# EAGLE board PandaSat_Payload (EAGLE 9.2.2)
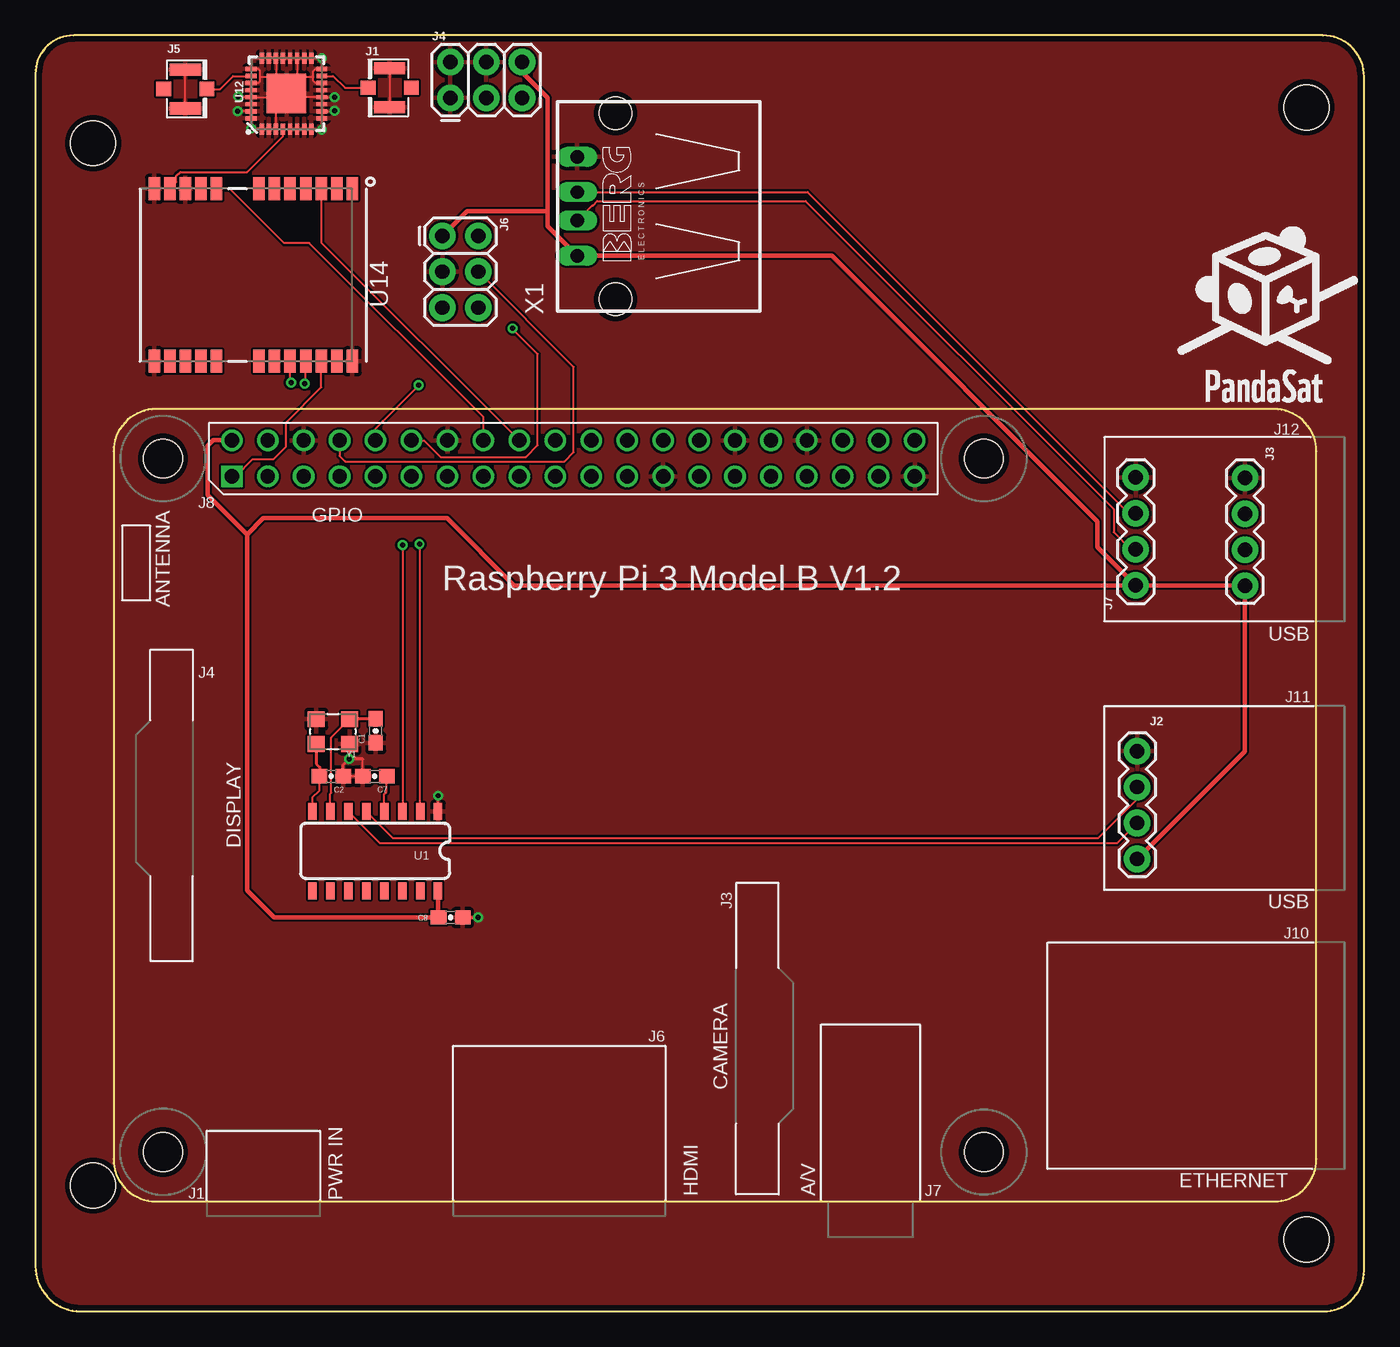
[diagram p0: board, top side]
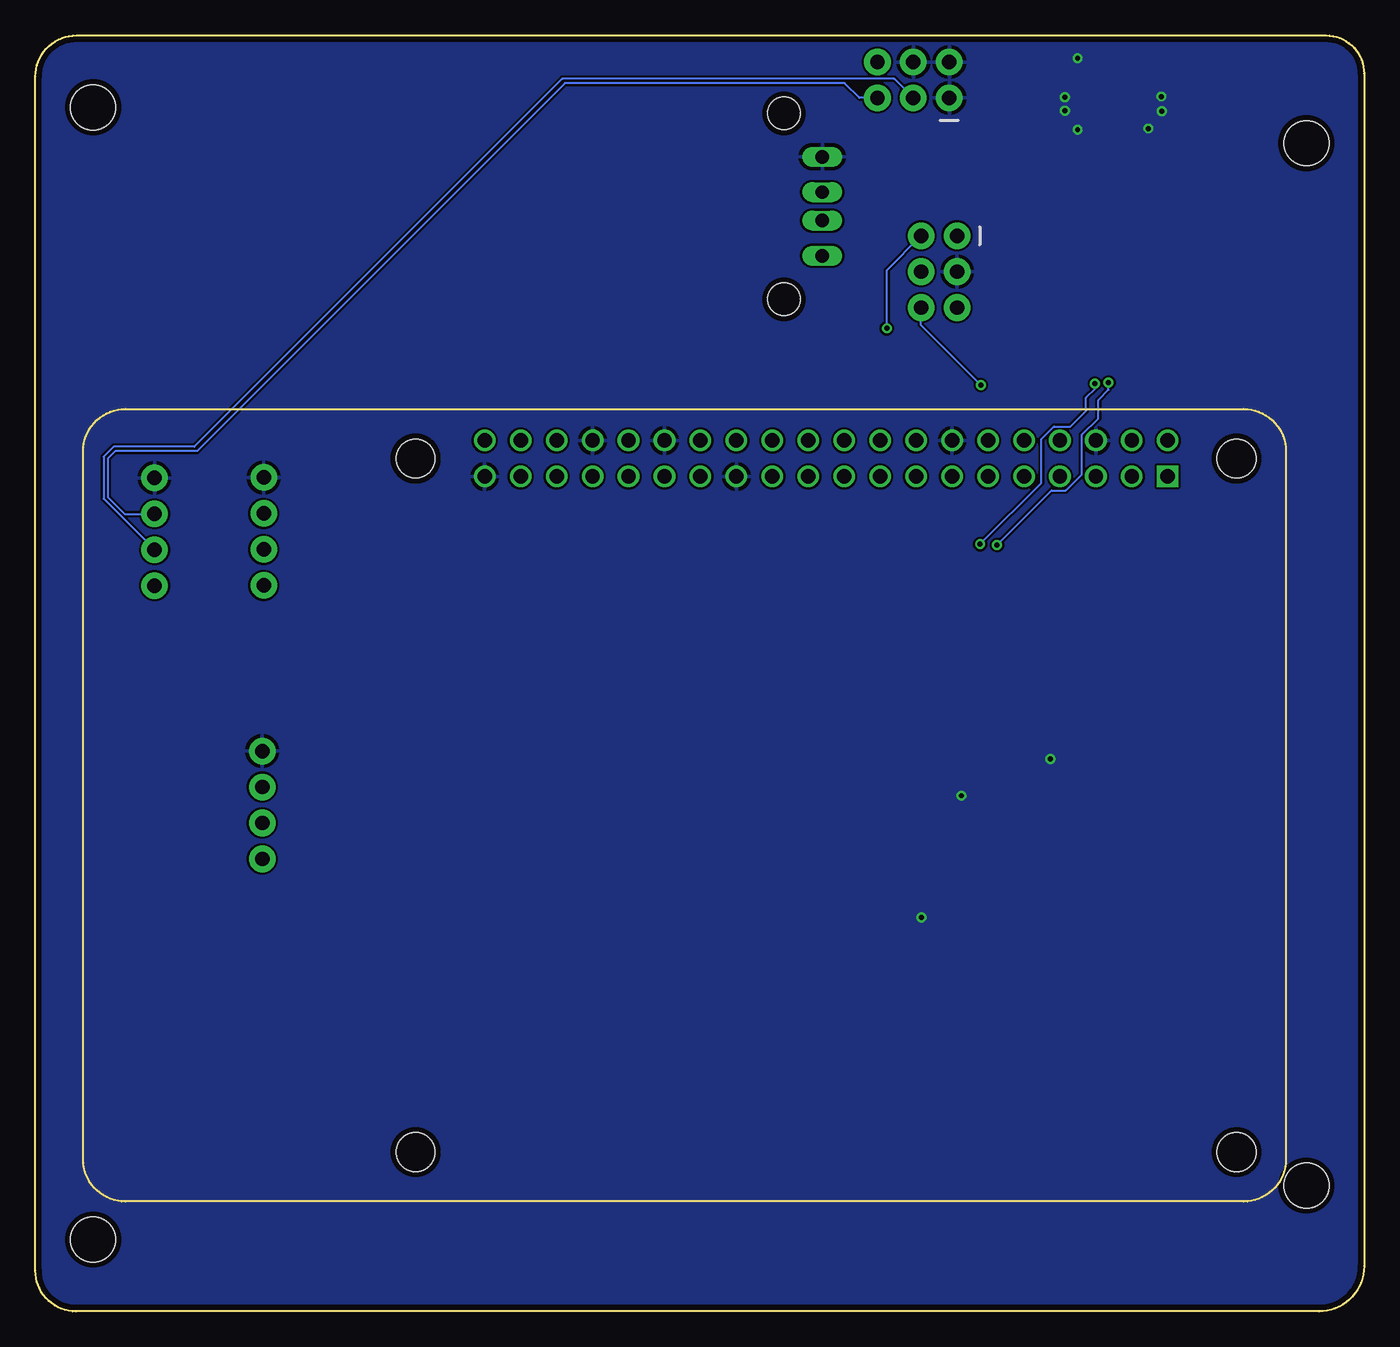
[diagram p1: board, bottom side, seen from below]

Size 93.89 x 90.17 mm. Coordinates in mm from the lower left corner, seen from the top.
Outline: 0,87.48 0,3.19 arc90 3.19,0 91.01,0 arc90 93.89,2.88 93.89,87.25 arc90 90.97,90.17 2.69,90.17 arc90 0,87.48
Copper layers (1*16): Top 0.035559375mm / dielectric 1.6mm / Bottom 0.035559375mm
Design rules "oshpark-2layer": minimum track width 6mil, minimum drill 10mil, track to track 6mil, track to pad 6mil, pad to pad 6mil, via to via 6mil, smd to smd 6mil, copper to edge 15mil, drill to drill 6mil, minimum pad ring 5mil, minimum via ring 5mil, stop-mask expansion 2.5mil, vias tented up to drill 0mil, thermal gap 10mil
Net classes: 1 power: width 0.178 mm
Holes 3.18 mm at 4.08,8.89 89.81,5.08 89.81,85.09 4.08,82.55

## Footprints (pad centres in the part's own frame; a part is rotated, then mirrored left to right if it is on the bottom)
0603-CAP = smd 1.1 x 1: 1 -0.85,0; 2 0.85,0
U.FL = smd 2.2 x 0.85: 1 0,1.375; 2 0,-1.375 | smd 1.05 x 1: FEED 1.525,0; NC -1.525,0
1X04 = drill 1.016 pad 1.88: 1 0,0; 2 2.54,0; 3 5.08,0; 4 7.62,0
2X3 = drill 1.016 pad 1.88: 1 0,0; 2 0,2.54; 3 2.54,0; 4 2.54,2.54; 5 5.08,0; 6 5.08,2.54
RPI3 = drill 1.016 square: P$1 8.37,51.23 | drill 1.016: P$2 8.357,53.772; P$3 10.897,51.232; P$4 10.897,53.772; P$5 13.437,51.232; P$6 13.437,53.772; P$7 15.977,51.232; P$8 15.977,53.772; P$9 18.517,51.232; P$10 18.517,53.772; P$11 21.057,51.232; P$12 21.057,53.772; P$13 23.597,51.232; P$14 23.597,53.772; P$15 26.137,51.232; P$16 26.137,53.772; P$17 28.677,51.232; P$18 28.677,53.772; P$19 31.217,51.232; P$20 31.217,53.772; P$21 33.757,51.232; P$22 33.757,53.772; P$23 36.297,51.232; P$24 36.297,53.772; P$25 38.837,51.232; P$26 38.837,53.772; P$27 41.377,51.232; P$28 41.377,53.772; P$29 43.917,51.232; P$30 43.917,53.772; P$31 46.457,51.232; P$32 46.457,53.772; P$33 48.997,51.232; P$34 48.997,53.772; P$35 51.537,51.232; P$36 51.537,53.772; P$37 54.077,51.232; P$38 54.077,53.772; P$39 56.617,51.232; P$40 56.617,53.772 | hole 2.75: 3.5,3.5; 61.5,3.5; 3.5,52.5; 61.5,52.5
SO016 = smd 0.6 x 1.2: 1 -4.445,-2.8; 2 -3.175,-2.8; 3 -1.905,-2.8; 4 -0.635,-2.8; 5 0.635,-2.8; 6 1.905,-2.8; 7 3.175,-2.8; 8 4.445,-2.8; 9 4.445,2.8; 10 3.175,2.8; 11 1.905,2.8; 12 0.635,2.8; 13 -0.635,2.8; 14 -1.905,2.8; 15 -3.175,2.8; 16 -4.445,2.8
QFN32-5X5MM = smd 0.762 x 0.305: 1 -2.5,1.75; 2 -2.5,1.25; 3 -2.5,0.75; 4 -2.5,0.25; 5 -2.5,-0.25; 6 -2.5,-0.75; 7 -2.5,-1.25; 8 -2.5,-1.75; 17 2.5,-1.75; 18 2.5,-1.25; 19 2.5,-0.75; 20 2.5,-0.25; 21 2.5,0.25; 22 2.5,0.75; 23 2.5,1.25; 24 2.5,1.75 | smd 0.305 x 0.762: 9 -1.75,-2.5; 10 -1.25,-2.5; 11 -0.75,-2.5; 12 -0.25,-2.5; 13 0.25,-2.5; 14 0.75,-2.5; 15 1.25,-2.5; 16 1.75,-2.5; 25 1.75,2.5; 26 1.25,2.5; 27 0.75,2.5; 28 0.25,2.5; 29 -0.25,2.5; 30 -0.75,2.5; 31 -1.25,2.5; 32 -1.75,2.5 | smd 2.794 x 2.794: EP 0,0
S1216_24PIN_PACKAGE = smd 1.626 x 0.813: 1 5.85,-7.62; 2 5.85,-6.52; 3 5.85,-5.42; 4 5.85,-4.32; 5 5.85,-3.22; 6 5.85,-2.12; 7 5.85,-1.02; 8 5.85,1.98; 9 5.85,3.08; 10 5.85,4.18; 11 5.85,5.28; 12 5.85,6.38; 13 -6.35,6.38; 14 -6.35,5.28; 15 -6.35,4.18; 16 -6.35,3.08; 17 -6.35,1.98; 18 -6.35,-1.02; 19 -6.35,-2.12; 20 -6.35,-3.22; 21 -6.35,-4.32; 22 -6.35,-5.42; 23 -6.35,-6.52; 24 -6.35,-7.62
PN87520 = drill 0.95 long: 1 -3.5,2.71; 2 -1,2.71; 3 1,2.71; 4 3.5,2.71 | hole 2.3: -6.57,0; 6.57,0
CRYSTAL-SMD-3.2X2.5 = smd 1.2 x 1.1: 1 -1.175,-0.875; 2 1.175,-0.875; 3 1.175,0.875; 4 -1.175,0.875

## Placement (x,y rotation side)
C1  10pF  [0603-CAP]  24.05,41.02 90 top
C2  10pF  [0603-CAP]  20.91,37.82 180 top
C7  10nF  [0603-CAP]  23.99,37.82 180 top
C8  0.1uF  [0603-CAP]  29.34,27.84 0 top
J1  U.FL  [U.FL]  25.04,86.46 180 top
J2  [1X04]  77.86,39.6 270 top
J3  [1X04]  85.47,58.9 270 top
J4  FEMALE 2x3  [2X3]  29.31,85.75 0 top
J5  U.FL  [U.FL]  10.6,86.38 0 top
J6  FEMALE 2x3  [2X3]  28.76,76.01 270 top
J7  [1X04]  77.75,51.31 90 top
PCB1  RPI3RPI3  [RPI3]  5.52,7.77 0 top
U1  CH340G  [SO016]  24.01,32.53 180 top
U12  EP2W+  [QFN32-5X5MM]  17.75,86.05 90 top
U14  S1216V8  [S1216_24PIN_PACKAGE]  14.78,73.49 90 top
X1  [PN87520]  41,78.09 90 top
Y1  12MHz  [CRYSTAL-SMD-3.2X2.5]  21.02,40.97 180 top

## Library data of the parts
C1 C2 = SparkFun-Capacitors; PROD_ID: CAP-11812
C7 = SparkFun-Capacitors; PROD_ID: CAP-00867
C8 = SparkFun-Capacitors; PROD_ID: CAP-00810
J1 J5 = SparkFun-Connectors; PROD_ID: CONN-09193; SF_ID: WRL-09144
J2 J3 J7 = SparkFun-Connectors; PROD_ID: CONN-09696
J4 J6 = SparkFun-Connectors; PROD_ID: CONN-11566
PCB1 = e14_Rpi3_RevA+mirror-pcb
U1 = SparkFun-DigitalIC; PROD_ID: IC-13498
U12 U14 = maholli
X1 = con-berg; OC_FARNELL: unknown; OC_NEWARK: unknown
Y1 = USB Basic; PROD_ID: XTAL-13518

## Nets
!CTS: U1.9
!DTR: U1.13
D2+: J3.2 J4.5
D2-: J3.3 J4.3
D+: J7.3 X1.3
D-: J7.2 X1.2
ENABLE1: J6.2 PCB1.P$12
GND: C1.1 C2.1 C7.2 C8.2 J1.1 J1.2 J2.1 J3.1 J4.1 J4.2 J4.4 J5.1 J5.2 J6.3 J7.4 PCB1.P$6 PCB1.P$14 PCB1.P$25 PCB1.P$30 PCB1.P$34 PCB1.P$39 U1.1 U12.1 U12.2 U12.3 U12.5 U12.6 U12.7 U12.8 U12.9 U12.10 U12.11 U12.12 U12.13 U12.14 U12.16 U12.17 U12.18 U12.19 U12.20 U12.21 U12.22 U12.23 U12.24 U12.25 U12.27 U12.28 U12.29 U12.30 U12.31 U12.32 U12.EP U14.10 U14.12 U14.13 U14.24 X1.4 Y1.2 Y1.4
GPS_CLK: PCB1.P$18 U14.3
GPS_RSTN: PCB1.P$16 U14.8
N$2: C2.2 U1.8 Y1.3
N$3: PCB1.P$20
N$5: C1.2 U1.7 Y1.1
RF_IN: U12.4 U14.11
RXI: U1.3 U14.20
TXO: U1.2 U14.21
U.FL1: J1.FEED U12.15
U.FL2: J5.FEED U12.26
UART2_RX: J6.6 PCB1.P$10
UART2_TX: J6.4 PCB1.P$8
UD+: J2.2 U1.5
UD-: J2.3 U1.6
V1: C7.1 U1.4
VCC3.3: PCB1.P$1 U14.22 U14.23
VCC5: C8.1 J2.4 J3.4 J4.6 J6.1 J7.1 PCB1.P$2 U1.16 X1.1

## Tracks (layer width: path | path; a pad name or v marks a point on that pad's centre or on a via)
D2+
  Bottom 0.152: J4.5 35.66,85.75 36.7,86.79 56.46,86.79 82.45,60.81 88.24,60.81 88.77,60.27 88.77,57.56 87.58,56.36 J3.2
D2-
  Bottom 0.152: J4.3 33.2,87.1 56.67,87.1 82.65,61.11 88.37,61.11 89.08,60.4 89.08,57.43 J3.3
D+
  Top 0.152: X1.3 54.56,79.09 77.27,56.39 J7.3
D-
  Top 0.152: X1.2 39.35,78.15 39.39,78.15 39.7,78.46 54.43,78.46 76.2,56.69 76.2,55.07 77.42,53.85 J7.2
ENABLE1  (via drill 0.35 pad 0.7)
  Top 0.152: PCB1.P$12 27.46,61.54 28.63,60.37 34.66,60.37 35.49,61.21 35.49,67.66 33.73,69.42 v33.73,69.47
  Bottom 0.152: v33.73,69.47 33.73,73.58 J6.2
GND  (via drill 0.35 pad 0.7)
  Top 0.152: U12.10 U12.9 v20.24,83.52 20.21,83.55 U12.8 U12.7 U12.6 U12.5 | U12.10 U12.11 U12.12 | U12.12 U12.13 U12.14 19.8,86.79 19.64,86.95 19.64,87.22 | 19.64,87.22 19.64,87.62 19.82,87.8 U12.16 v20.25,88.54 v20.24,88.54 v20.24,88.55 U12.17 U12.18 U12.19 | U12.19 U12.20 U12.21 U12.22 | U12.22 16.98,88.58 16.52,88.58 U12.23 U12.24 15.42,88.55 15.25,88.38 U12.25 15.73,87.81 15.86,87.67 15.86,87.25 | 15.86,87.25 15.86,86.9 15.75,86.79 U12.27 U12.28 U12.29 | U12.31 U12.32 v15.25,83.6 v15.24,83.59 15.98,83.59 16,83.58 U12.1 U12.2 U12.3 17,85.63 17.17,85.8 | U12.31 U12.30 U12.29 | U12.29 14.38,85.8 v14.33,85.85 | U12.31 15.24,84.81 v14.3,84.81 | 15.86,87.25 16.55,87.25 17,86.8 | 17,86.8 17.59,86.22 | 17.59,86.22 U12.EP 18,85.8 U12.12 | 19.64,87.22 18.59,87.22 18.5,87.13 | 18.5,87.13 17.59,86.22 | U12.29 17.17,85.8 | 17.17,85.8 17.59,86.22 | U12.22 17,86.8 | U12.19 18.5,87.13 | U12.12 v21.13,85.8 | U12.10 21.1,84.8 v21.13,84.84 | Y1.4 22.2,39.06 v22.17,39.04 | U1.1 v28.45,36.45 | C2.1 C7.2 23.14,39.04 | J1.2 J1.1 | J5.2 10.56,85.05 10.56,87.72 J5.1
  Top 0.203: C8.2 v31.29,27.84 | C2.1 21.76,38.62 v22.17,39.04 23.14,39.04
  pour Bottom: -1,91 95,91 95,-2 -1,-2
  pour Top: -1.57,91.49 -1.57,-1.47 -1.55,-1.5 95.3,-1.12 95.71,91.67
GPS_CLK
  Top 0.152: U14.3 20.2,75.54 PCB1.P$18
GPS_RSTN
  Top 0.152: PCB1.P$16 31.66,63.19 19.36,75.49 17.58,75.49 13.73,79.34 U14.8
N$2
  Top 0.152: C2.2 20.06,36.8 19.57,36.3 U1.8
  Top 0.203: Y1.3 19.84,38.7 20.09,38.46 20.09,37.85 C2.2
N$5
  Top 0.152: U1.7 20.84,36.58 20.9,36.65 20.9,40.56 Y1.1
  Top 0.203: C1.2 22.22,41.88 Y1.1
RF_IN
  Top 0.152: U14.11 9.96,79.8 9.96,80.24 10.24,80.52 14.96,80.52 17.5,83.06 U12.4
RXI  (via drill 0.35 pad 0.7)
  Top 0.152: v25.93,54.16 25.93,35.35 U1.3 | v18.06,65.63 18,65.69 U14.20
  Bottom 0.152: v18.06,65.63 18.06,65.13 18.8,64.39 18.8,63.1 19.95,61.95 19.95,59.15 21.09,58.01 22.08,58.01 v25.93,54.16
TXO  (via drill 0.35 pad 0.7)
  Top 0.152: v27.13,54.22 27.13,35.38 U1.2 | v19.02,65.56 19.1,65.63 U14.21
  Bottom 0.152: v27.13,54.22 22.81,58.54 22.81,61.63 21.91,62.53 20.75,62.53 19.66,63.63 19.66,64.57 19,65.23 19,65.53 v19.02,65.56
U.FL1
  Top 0.152: U12.15 21.04,87.3 21.88,86.46 J1.FEED
U.FL2
  Top 0.152: J5.FEED 13.04,86.38 13.96,87.3 U12.26
UART2_RX  (via drill 0.35 pad 0.7)
  Top 0.152: PCB1.P$10 24.04,62.38 24.57,62.92 27.08,65.42 v27.08,65.46
  Bottom 0.152: v27.08,65.46 31.3,69.68 J6.6
UART2_TX
  Top 0.152: PCB1.P$8 21.5,60.45 21.89,60.05 37.38,60.05 38.03,60.71 38.03,66.74 J6.4
UD+
  Top 0.152: U1.5 25.25,33.45 75.11,33.45 77.86,36.2 J2.2
UD-
  Top 0.152: U1.6 24.34,33.1 76.44,33.1 J2.3
V1
  Top 0.152: C7.1 24.81,37.73 24.81,36.72 24.64,36.56 U1.4
VCC3.3
  Top 0.152: PCB1.P$1 14.14,59 15.37,60.22 16.83,60.22 17.71,61.11 17.71,62.82 20.2,65.31 U14.22 U14.23
VCC5
  Top 0.305: PCB1.P$2 13.85,61.57 12.57,61.57 12.19,61.19 12.19,57.68 14.96,54.91 | U1.16 28.45,29.67 28.46,29.66 28.46,27.89 28.49,27.86 C8.1 16.87,27.84 14.96,29.74 14.96,54.91 | J4.6 34.39,87.58 36.2,85.78 36.2,77.75 | 36.2,77.75 36.2,76.68 X1.1 56.3,74.59 75.06,55.83 75.06,54 J7.1 | J6.1 30.5,77.75 36.2,77.75 | 85.45,51.31 J3.4 | J7.1 85.45,51.31 | 85.45,51.31 85.45,39.56 J2.4 | J7.1 33.83,51.31 29.08,56.06 16.1,56.06 14.96,54.91